# Altium PCB mixer.PcbDoc
Units mm, origin at the board's own origin, x right, y up, seen from the top; angles counter-clockwise.
Board outline 50 x 50 mm, 4 copper layers (Top Layer, Layer 2, Layer 3, Bottom Layer), stack 1.513 mm thick; 68 components, 37 nets, 156 pads, 152 vias.
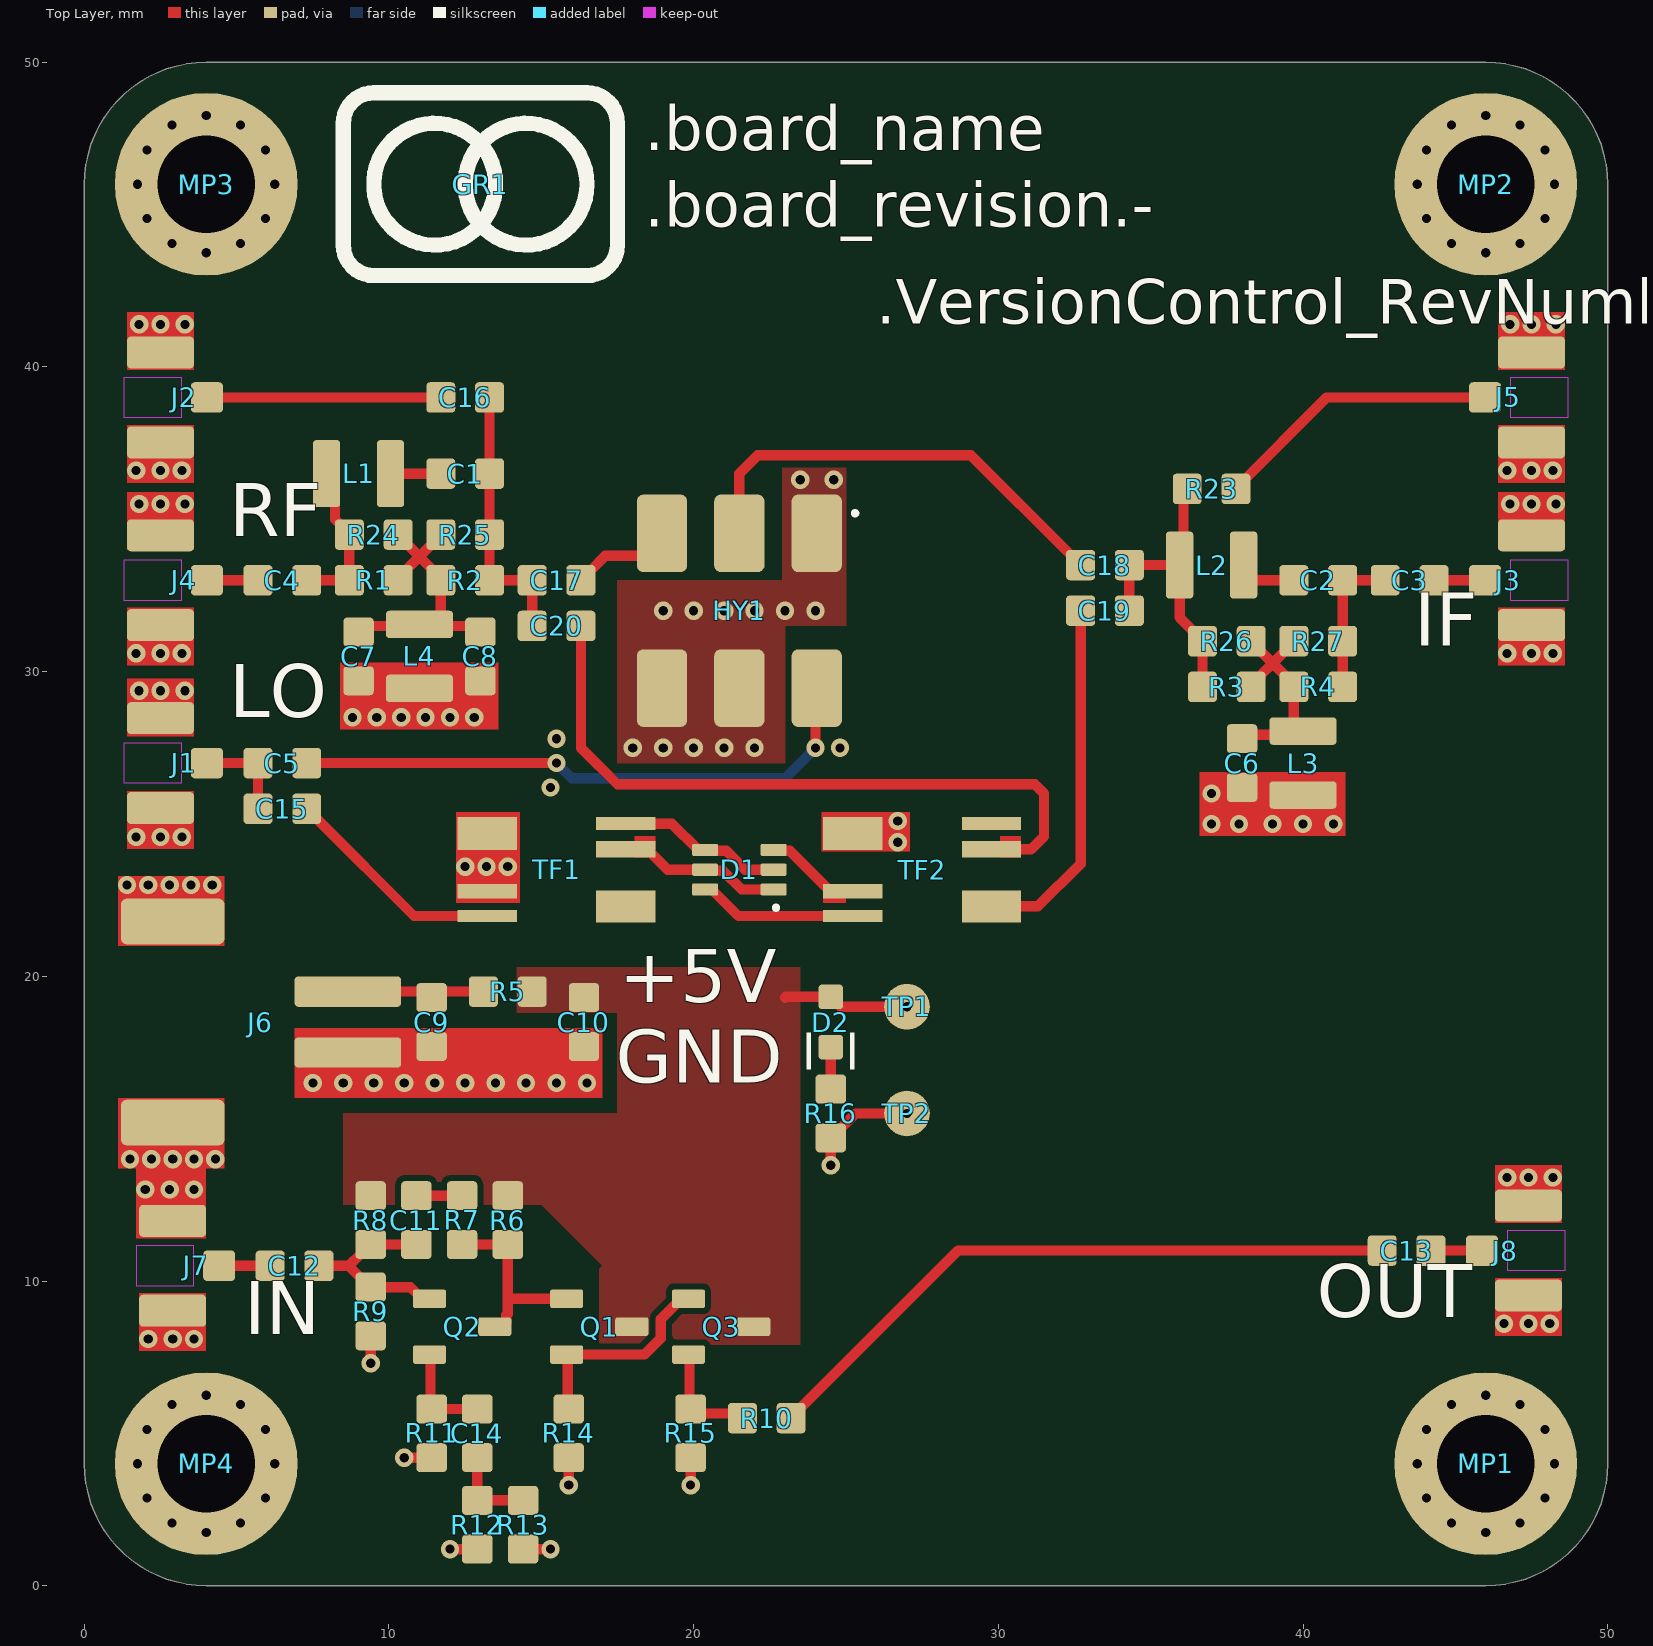
[diagram p0: Top Layer view]
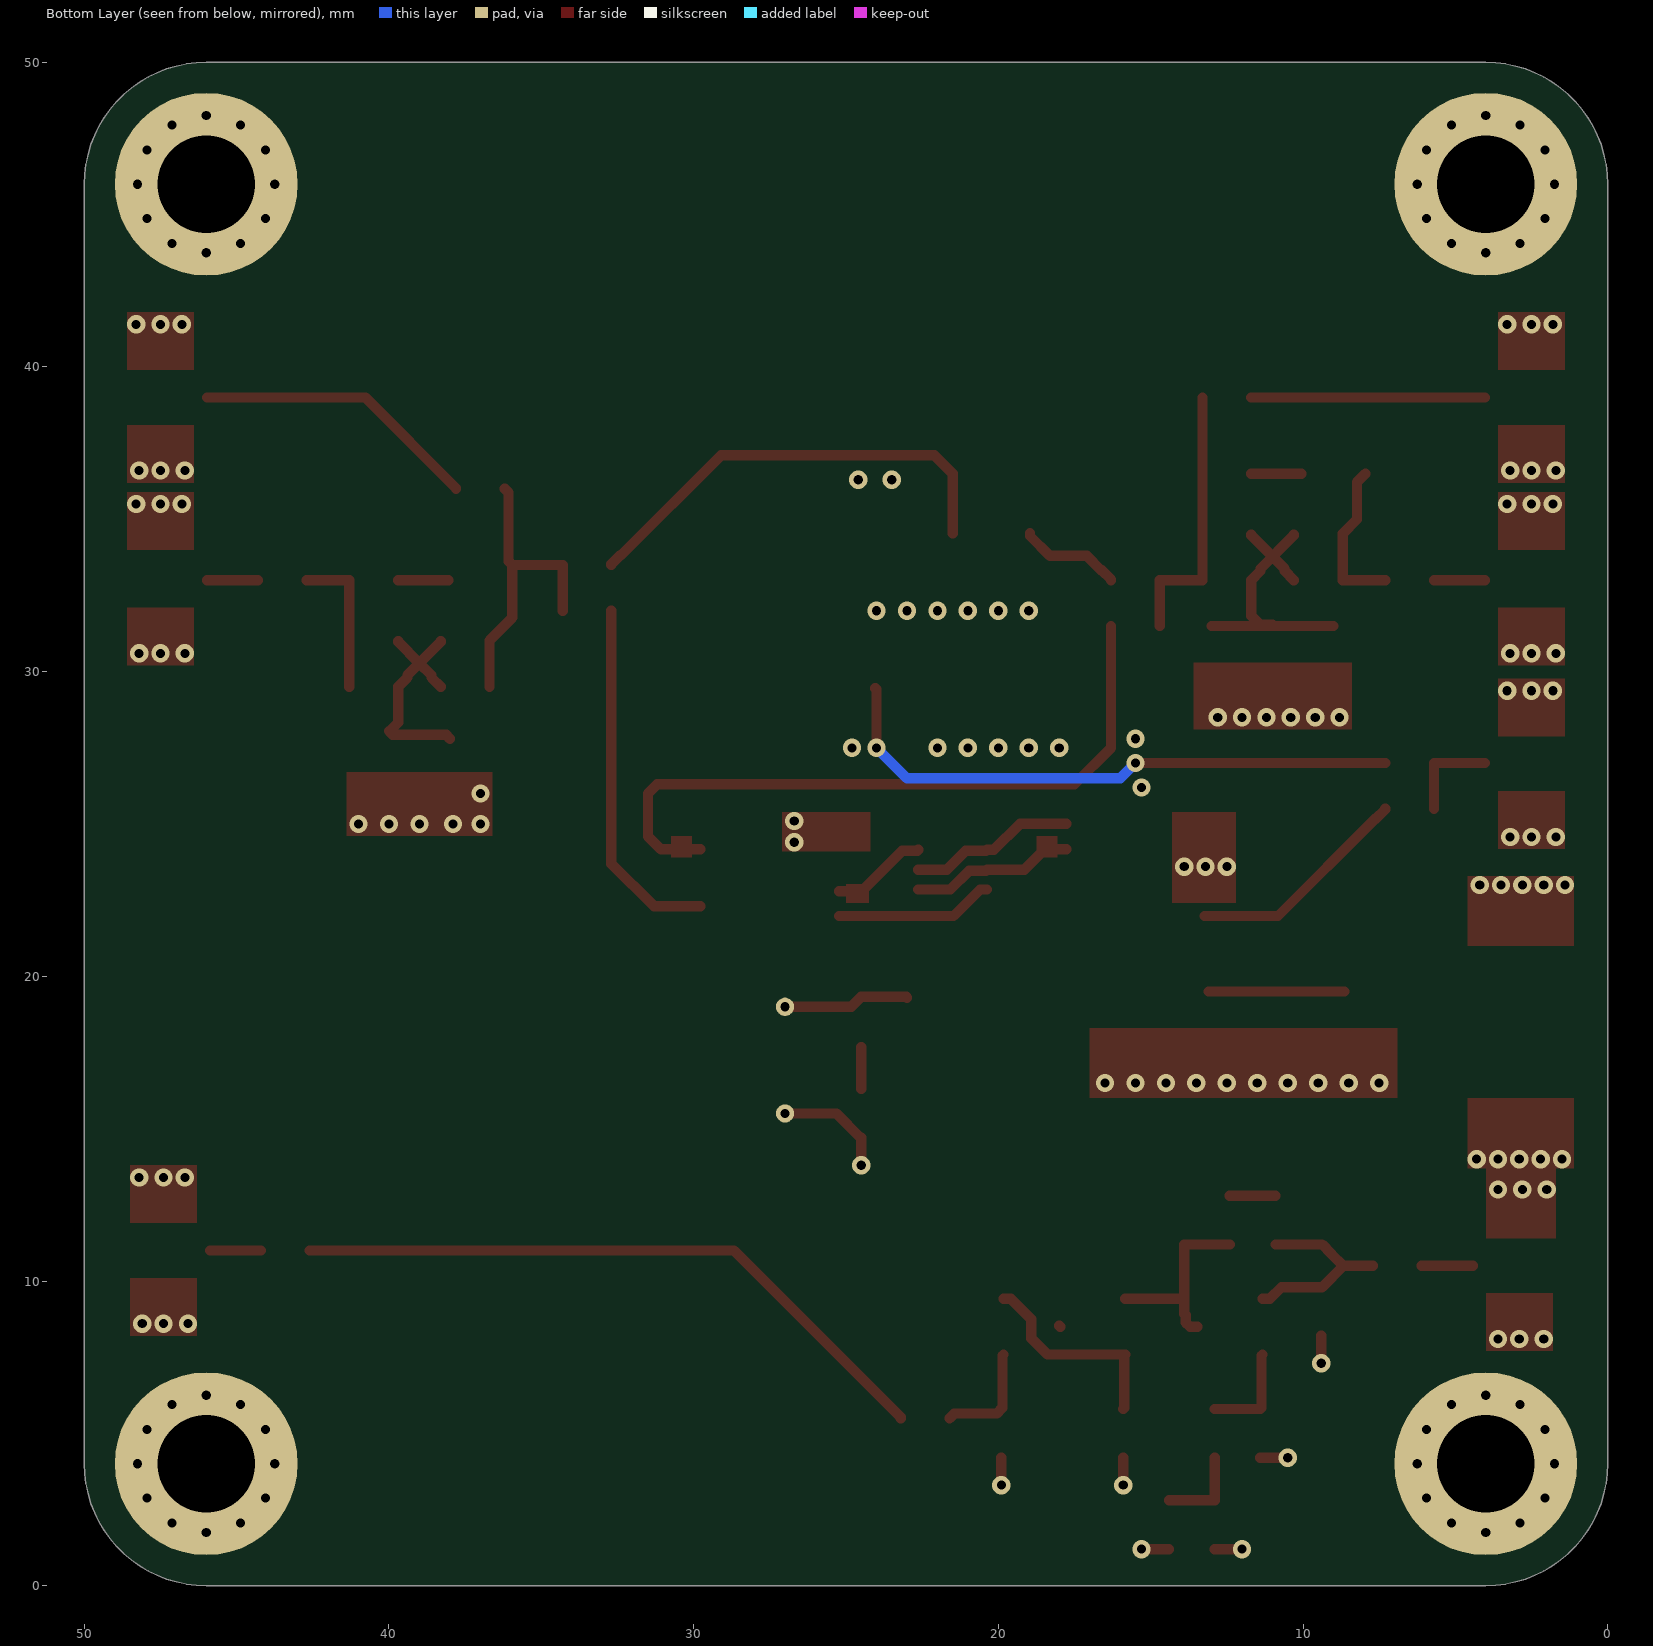
[diagram p1: Bottom Layer view, seen from below]
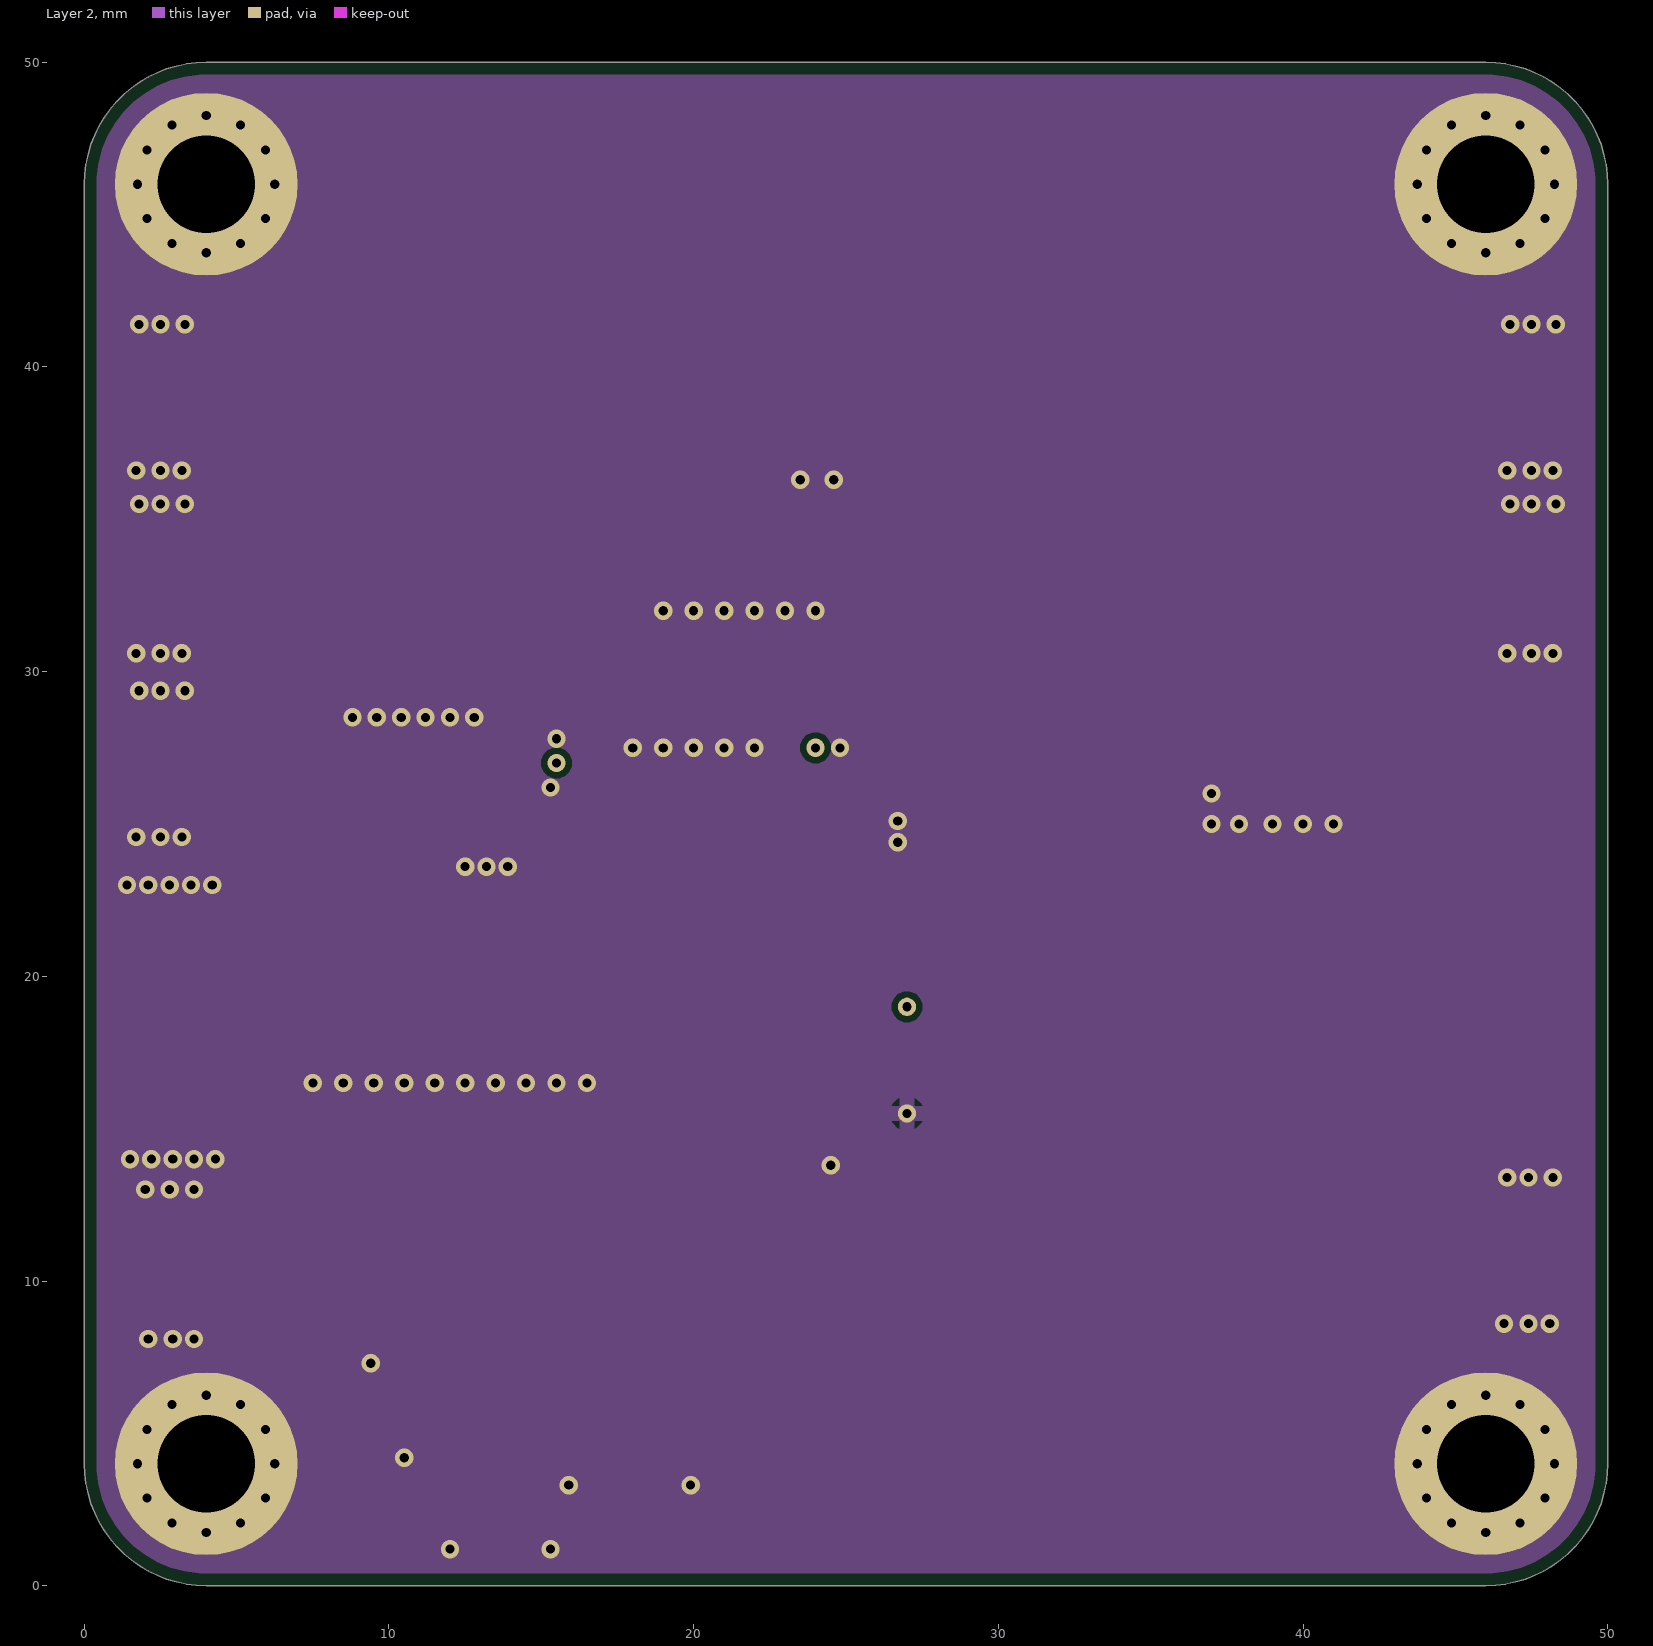
[diagram p2: Layer 2]
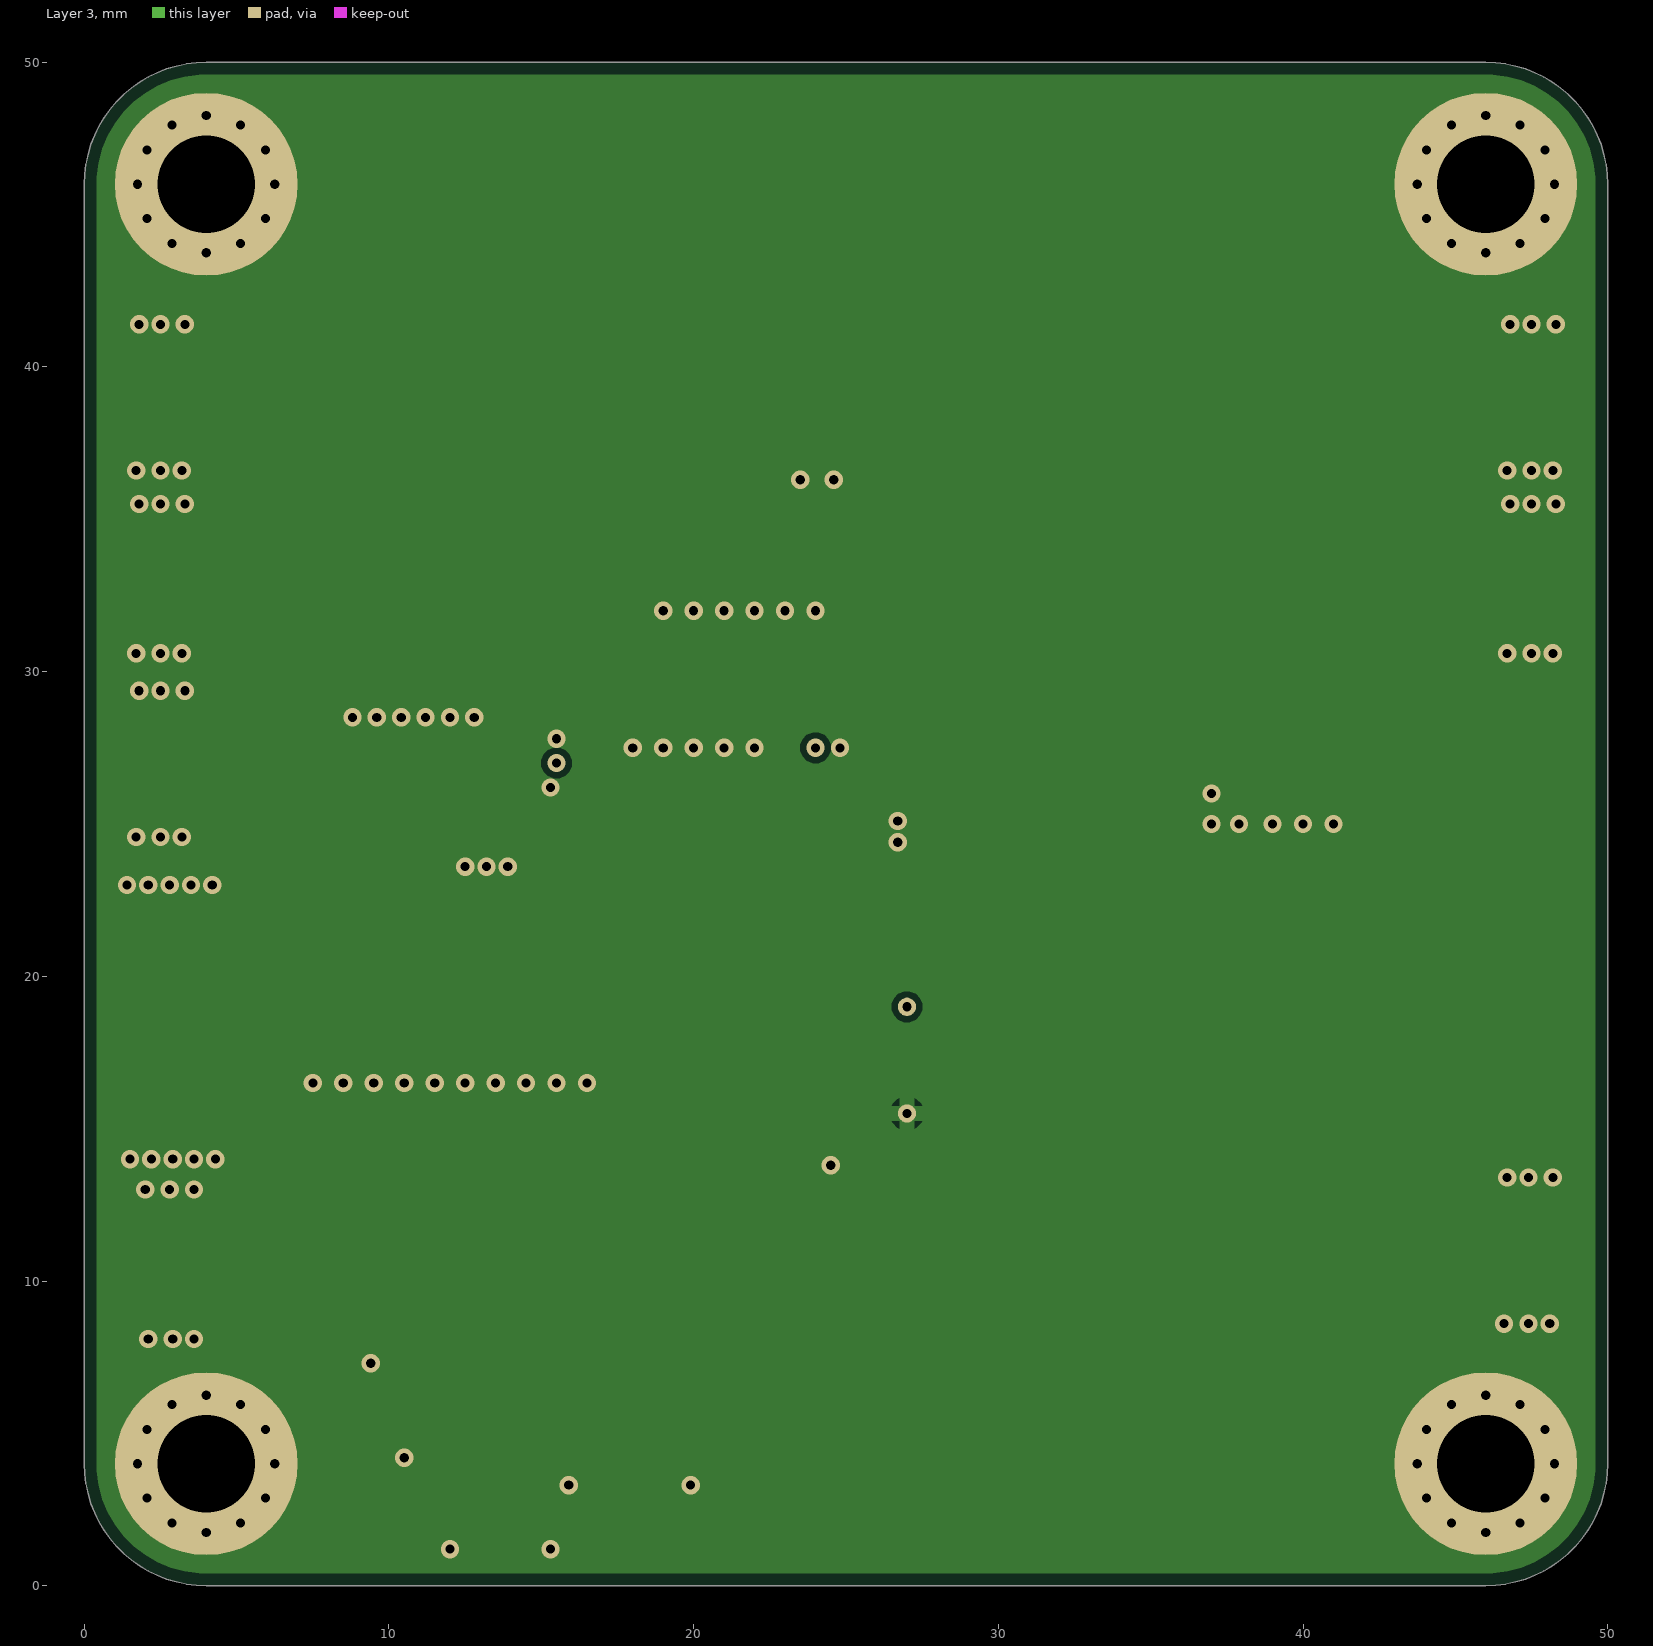
[diagram p3: Layer 3]
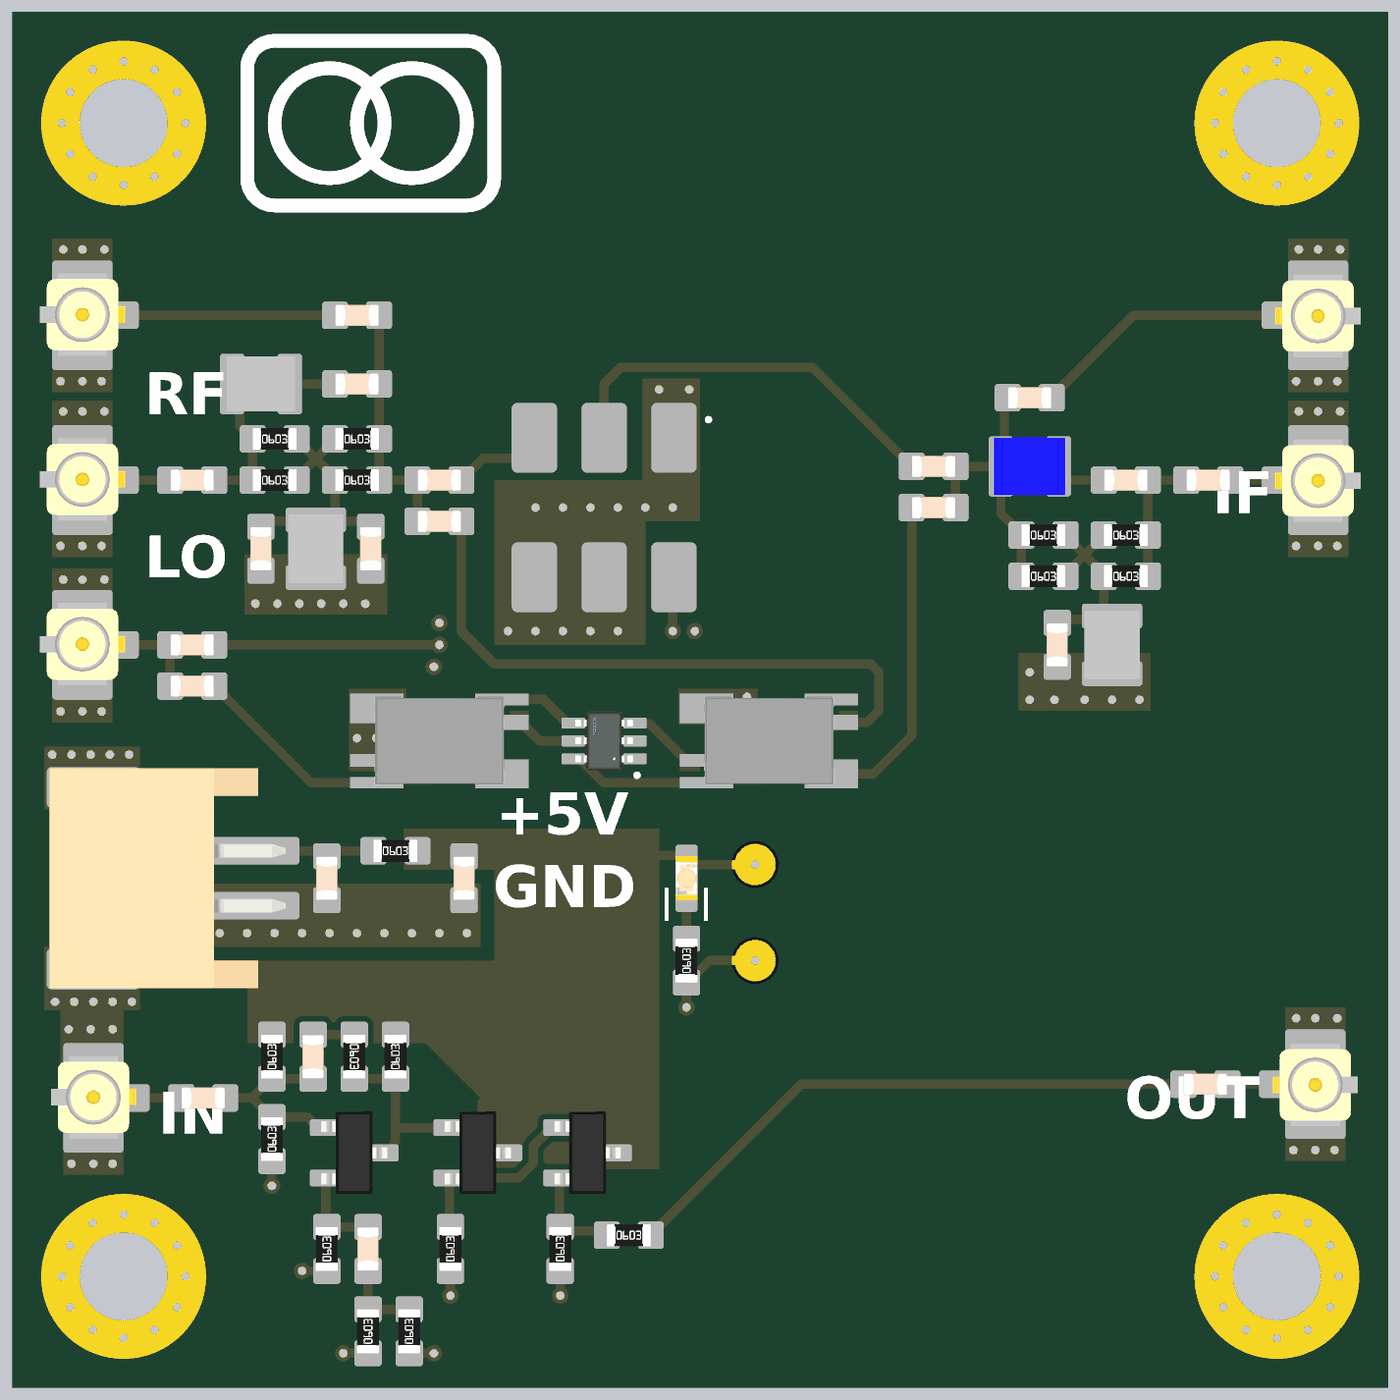
[diagram p4: 3D render of the assembled board from above, using the file's embedded part models]

## Layer stack, top to bottom
Top Solder: solder mask 0.0254, SM-001, Dk 4
Top Layer: signal copper 0.035
Dielectric 2: prepreg 0.2083, PP-022, Dk 4.5
Layer 2: signal copper 0.018
Dielectric 3: core 0.9906, Core-042, Dk 4.6
Layer 3: signal copper 0.018
Dielectric 5: prepreg 0.2083, PP-022, Dk 4.5
Bottom Layer: signal copper 0.035
Bottom Solder: solder mask 0.0254, SM-001, Dk 4

## Board outline
0,4 ccw(c4,4) 4,0 46,0 ccw(c46,4) 50,4 50,46 ccw(c46,46) 46,50 4,50 ccw(c4,46) 0,46

## Design rules (kind name [scope] priority, off if disabled: settings)
BoardOutlineClearance [IsElectrical or IsPoly] p1: gap=0.4 ignorepadtopadclearanceinfootprint=FALSE
Clearance Clearance_SelectiveSoldering [ispad and IsThruPin and not InComponentClass('NoSelectiveSoldering') vs ispad and IsSMTPin] p1 off: gap=4 ignorepadtopadclearanceinfootprint=TRUE // excludes smt studs
Clearance Clearance_NTPH_to_Track [IsTrack vs IsPad and IsThruPin and not PadIsPlated] p2: gap=0.254 ignorepadtopadclearanceinfootprint=TRUE
Clearance Clearance_TH_Pad_to_TH_Pad [IsPad and IsThruPin vs IsPad and IsThruPin] p3: gap=0.5 ignorepadtopadclearanceinfootprint=TRUE
Clearance Clearance_SMT_Pad_to_SMT_Pad [IsPad and IsSMTPin vs IsPad and IsSMTPin] p4: gap=0 ignorepadtopadclearanceinfootprint=TRUE
Clearance Clearance_No_Via_in_Pad [IsPad and not InPadClass('Via_in_pad_allowed') vs (IsVia AND not HasFootprint('PTH-M3D6.5_VIA-RING'))] p5 off: gap=0.1 ignorepadtopadclearanceinfootprint=TRUE
Clearance Clearance_Others [All] p6: gap=0.2 ignorepadtopadclearanceinfootprint=FALSE except(0.127: SMDPad-SMDPad)
ComponentClearance OverlappingComponents [InComponentClass('Overlap') vs InComponentClass('Overlap')] p1: gap=-10 collisioncheckmode=3 verticalgap=0 showdistances=TRUE donotcheckwithout3dbody=TRUE
ComponentClearance [All] p2: gap=0 collisioncheckmode=3 verticalgap=0.254 showdistances=FALSE
DiffPairsRouting HDMI [InDifferentialPairClass('HDMI')] p1: maxlimit=0.254 minlimit=0.2 mostfreqgap=0.254 toplayer_maxgap=0.2 toplayer_prefgap=0.2 toplayer_minwidth=0.207 toplayer_maxwidth=0.207 toplayer_prefwidth=0.207 midlayer1_minwidth=0.381 midlayer1_maxwidth=0.381 midlayer1_prefwidth=0.381 midlayer2_minwidth=0.381 midlayer2_maxwidth=0.381 midlayer2_prefwidth=0.381 bottomlayer_maxgap=0.2 bottomlayer_prefgap=0.2 bottomlayer_minwidth=0.207 bottomlayer_maxwidth=0.207 bottomlayer_prefwidth=0.207 impedanceprofiledriven=TRUE maxuncoupledlength=12.7
DiffPairsRouting ETH [InDifferentialPairClass('ETH')] p2: maxlimit=0.254 minlimit=0.2 mostfreqgap=0.254 toplayer_maxgap=0.2 toplayer_prefgap=0.2 toplayer_minwidth=0.207 toplayer_maxwidth=0.207 toplayer_prefwidth=0.207 midlayer1_minwidth=0.381 midlayer1_maxwidth=0.381 midlayer1_prefwidth=0.381 midlayer2_minwidth=0.381 midlayer2_maxwidth=0.381 midlayer2_prefwidth=0.381 bottomlayer_maxgap=0.2 bottomlayer_prefgap=0.2 bottomlayer_minwidth=0.207 bottomlayer_maxwidth=0.207 bottomlayer_prefwidth=0.207 maxuncoupledlength=12.7
DiffPairsRouting USB [InDifferentialPairClass('USB')] p3: maxlimit=0.235 minlimit=0.192 mostfreqgap=0.235 toplayer_mingap=0.235 toplayer_minwidth=0.17 toplayer_maxwidth=0.17 toplayer_prefwidth=0.17 midlayer1_maxgap=0.192 midlayer1_prefgap=0.192 midlayer1_minwidth=0.13 midlayer1_maxwidth=0.13 midlayer1_prefwidth=0.13 midlayer2_mingap=0.192 midlayer2_maxgap=0.192 midlayer2_prefgap=0.192 midlayer2_minwidth=0.13 midlayer2_maxwidth=0.13 midlayer2_prefwidth=0.13 bottomlayer_mingap=0.235 bottomlayer_minwidth=0.17 bottomlayer_maxwidth=0.17 bottomlayer_prefwidth=0.17 impedanceprofiledriven=TRUE impedanceprofileid={9A9647CF-1067-4F27-82A4-C3440F9DA648} maxuncoupledlength=12.7
HoleSize NPTH_HoleSize [IsPad And not PadIsPlated] p1: absolutevalues=TRUE maxlimit=3.7 minlimit=0.2 maxpercent=80.000 minpercent=20.000
HoleSize Pad_HoleSize [IsPad] p2: absolutevalues=TRUE maxlimit=4.2 minlimit=0.3 maxpercent=80.000 minpercent=20.000
HoleSize Via_HoleSize [IsVia] p3: absolutevalues=TRUE maxlimit=6.3 minlimit=0.2 maxpercent=80.000 minpercent=20.000
HoleToHoleClearance [All] p1: gap=0.254 allowstackedmicrovias=FALSE
MatchedLengths InterPair_skew_HDMI [InDifferentialPairClass('HDMI')] p1: tolerance=1 checknetsindiffpair=FALSE checkdiffpairvsdiffpair=TRUE checkxsignals=TRUE checkothers=TRUE
MatchedLengths IntraPair_skew_all_DiffPairs [InDifferentialPairClass('All Differential Pairs')] p2: tolerance=0.15 checknetsindiffpair=TRUE checkdiffpairvsdiffpair=FALSE checkxsignals=FALSE checkothers=FALSE
MinimumAnnularRing [All] p1: minimumring=0.13
MinimumSolderMaskSliver [All] p1: minsoldermaskwidth=0.2
PolygonConnect PolygonConnect_NonSoldering [All vs InComponentClass('NonSolder')] p1: connectstyle=Direct reliefconductorwidth=0.254 reliefentries=4 polygonreliefangle="90 Angle" airgapwidth=0.254
PolygonConnect [All] p2: thpad.connectstyle=Relief thpad.reliefconductorwidth=0.5 thpad.reliefentries=4 thpad.polygonreliefangle="90 Angle" thpad.airgapwidth=0.254 smdpad.connectstyle=Direct smdpad.reliefconductorwidth=0.5 smdpad.reliefentries=4 smdpad.polygonreliefangle="90 Angle" smdpad.airgapwidth=0.254 via.connectstyle=Direct via.reliefconductorwidth=0.5 via.reliefentries=4 via.polygonreliefangle="90 Angle" via.airgapwidth=0.254
RoutingVias [All] p1: holewidth=0.3 width=0.6 viastyle="Through Hole" minholewidth=0.3 minwidth=0.6 maxholewidth=0.3 maxwidth=0.6
SilkToSolderMaskClearance [IsPad] p1: minsilkscreentomaskgap=0.2 clearancetoexposedcopper=TRUE
SolderMaskExpansion SolderMaskExpansion_Via [IsVia] p1: expansion=0.102 istentingtop=TRUE
SolderMaskExpansion SolderMaskExpansion_notVia [not IsVia] p2: expansion=0.05 istentingtop=FALSE
SupplyNets "Schematic Supply Nets_5" [InNet('VCC')] p1: voltage=0.000
SupplyNets "Schematic Supply Nets_2" [InNet('GND')] p2: voltage=0.000
Width S50_Width [InNetClass('S50')] p1: maxlimit=0.338 minlimit=0.133 preferedwidth=0.338 toplayer_minwidth=0.338 bottomlayer_minwidth=0.338 impedanceprofiledriven=TRUE impedanceprofileid={51D6754A-4034-4FAC-8A16-9F3950D7C6EB} impedanceprofilevalue=50.000000 minimp=50.000000 maximp=50.000000 favimp=50.000000
Width Default_Width [All] p2: maxlimit=2.5 minlimit=0.15 preferedwidth=0.33
24 further rules are at their usual default settings.

## Classes and differential pairs
component class NonSolder: MP1 MP2 MP3 MP4
net class S50: IF LO NetC1_1 NetC2_1 NetC2_2 NetC3_1 NetC4_1 NetC4_2 NetC5_2 NetC6_2 NetC7_2 NetC11_2 NetC12_2 NetC13_1 NetC13_2 NetC14_1 NetC15_2 NetC16_2 NetC17_2 NetC18_1 NetC19_1 NetC20_2 NetD1_1 NetD1_2 NetD1_3 NetD1_6 NetJ5_1 NetQ1_1 NetQ1_2 NetQ3_2 RF

## Components (designator, comment, footprint, x,y, rotation, side; value= is the part's Value field where it differs from the comment)
C1 "Capacitor 6.8pF +/-0.5pF 50V NP0 0603" 0603-C-N 12.5,36.5 r0 top value=6.8pF
C2 "Capacitor 33pF +/-1% 50V NP0 0603" 0603-C-N 40.5,33 r0 top value=33pF
C3 "Capacitor 100nF +/-10% 50V X7R 0603" 0603-C-N 43.5,33 r180 top value=100nF
C4 "Capacitor 10nF 50V NP0 0603" 0603-C-N 6.5,33 r0 top value=10nF
C5 "Capacitor 10nF 50V NP0 0603" 0603-C-N 6.5,27 r0 top value=10nF
C6 "Capacitor 3.3nF +/-10% 50V X7R 0603" 0603-C-N 38,27 r90 top value=3.3nF
C7 "Capacitor 100pF +/-5% 50V NP0 0603" 0603-C-N 9,30.5 r90 top value=100pF
C8 "Capacitor 47pF +/-5% 50V C0G 0603" 0603-C-N 13,30.5 r90 top value=47pF
C9 "Capacitor 100nF +/-10% 50V X7R 0603" 0603-C-N 11.4,18.5 r90 top value=100nF
C10 "Capacitor 100nF +/-10% 50V X7R 0603" 0603-C-N 16.4,18.5 r90 top value=100nF
C11 "Capacitor 100nF +/-10% 50V X7R 0603" 0603-C-N 10.9,12 r270 top value=100nF
C12 "Capacitor 100nF +/-10% 50V X7R 0603" 0603-C-N 6.9,10.5 r180 top value=100nF
C13 "Capacitor 100nF +/-10% 50V X7R 0603" 0603-C-N 43.4,11 r0 top value=100nF
C14 "Capacitor 100nF +/-10% 50V X7R 0603" 0603-C-N 12.9,5 r270 top value=100nF
C15 "Capacitor 10nF 50V NP0 0603" 0603-C-N 6.5,25.5 r0 top value=10nF
C16 "Capacitor 10nF 50V NP0 0603" 0603-C-N 12.5,39 r180 top value=10nF
C17 "Capacitor 10nF 50V NP0 0603" 0603-C-N 15.5,33 r0 top value=10nF
C18 "Capacitor 10nF 50V NP0 0603" 0603-C-N 33.5,33.5 r0 top value=10nF
C19 "Capacitor 10nF 50V NP0 0603" 0603-C-N 33.5,32 r0 top value=10nF
C20 "Capacitor 10nF 50V NP0 0603" 0603-C-N 15.5,31.5 r0 top value=10nF
D1 "BAV99S115" SOT-363-N 21.5,23.5 r180 top
D2 "150060GS84000" WL-SMCW_0603_150060xx8x000 24.5,18.5 r90 top
GR1 "Logo" LOGO_9x6mm 13,46 r0 top
HY1 "ADE-1+" ADE-1+ 21.5,32 r270 top
J1 "U.FL-R-SMT(10)" HRS-U.FL-R-SMT_V 2.5,27 r90 top value=U.FL
J2 "U.FL-R-SMT(10)" HRS-U.FL-R-SMT_V 2.5,39 r90 top value=U.FL
J3 "U.FL-R-SMT(10)" HRS-U.FL-R-SMT_V 47.5,33 r270 top value=U.FL
J4 "U.FL-R-SMT(10)" HRS-U.FL-R-SMT_V 2.5,33 r90 top value=U.FL
J5 "U.FL-R-SMT(10)" HRS-U.FL-R-SMT_V 47.5,39 r270 top value=U.FL
J6 "620102131822" 620102131822 6.9,18.5 r270 top value=JST-PH
J7 "U.FL-R-SMT(10)" HRS-U.FL-R-SMT_V 2.9,10.5 r90 top value=U.FL
J8 "U.FL-R-SMT(10)" HRS-U.FL-R-SMT_V 47.4,11 r270 top value=U.FL
L1 "744762239GA" WE-KI_1008 9,36.5 r0 top
L2 "744758368A" WE-RFH_1008A 37,33.5 r0 top
L3 "744762168GA" WE-KI_1008 40,27 r90 top
L4 "744762118A" WE-KI_1008 11,30.5 r90 top
MP1 "MountingHole" PTH-M3D6.5_VIA-RING 46,4 r0 top
MP2 "MountingHole" PTH-M3D6.5_VIA-RING 46,46 r0 top
MP3 "MountingHole" PTH-M3D6.5_VIA-RING 4,46 r0 top
MP4 "MountingHole" PTH-M3D6.5_VIA-RING 4,4 r0 top
Q1 "MMBT3904" SOT-23-3-N 16.9,8.5 r0 top
Q2 "MMBT3904" SOT-23-3-N 12.4,8.5 r0 top
Q3 "MMBT3904" SOT-23-3-N 20.9,8.5 r0 top
R1 "Resistor 100R +/-1% 50V 0603" 0603-R-N 9.5,33 r0 top value=100
R2 "Resistor 100R +/-1% 50V 0603" 0603-R-N 12.5,33 r0 top value=100
R3 "Resistor 100R +/-1% 50V 0603" 0603-R-N 37.5,29.5 r0 top value=100
R4 "Resistor 100R +/-1% 50V 0603" 0603-R-N 40.5,29.5 r0 top value=100
R5 "Resistor 10R +/-1% 50V 0603" 0603-R-N 13.9,19.5 r0 top value=10
R6 "Resistor 330R +/-1% 50V 0603" 0603-R-N 13.9,12 r90 top value=330
R7 "Resistor 680R +/-1% 0.1W 0603" 0603-R-N 12.4,12 r270 top value=680
R8 "Resistor 3.6k +/-0.1W 1% 0603" 0603-R-N 9.4,12 r90 top value=3.6k
R9 "Resistor 1.5k +/-1% 50V 0603" 0603-R-N 9.4,9 r90 top value=1.5k
R10 "Resistor 47R +/-1% 0.1W 0603" 0603-R-N 22.4,5.5 r0 top value=47
R11 "Resistor 91R +/-1% 0.1W 0603" 0603-R-N 11.4,5 r90 top value=91
R12 "Resistor 18R +/-1% 0.1W 0603" 0603-R-N 12.9,2 r90 top value=18
R13 "Resistor 330R +/-1% 50V 0603" 0603-R-N 14.4,2 r90 top value=330
R14 "Resistor 470R +/-1% 50V 0603" 0603-R-N 15.9,5 r90 top value=470
R15 "Resistor 62R +/-1% 0.1W 0603" 0603-R-N 19.9,5 r90 top value=62
R16 "Resistor 3.6k +/-0.1W 1% 0603" 0603-R-N 24.5,15.5 r90 top value=3.6k
R23 "Capacitor 10nF 50V NP0 0603" 0603-C-N 37,36 r180 top value=10nF
R24 "Resistor 100R +/-1% 50V 0603" 0603-R-N 9.5,34.5 r0 top value=100
R25 "Resistor 100R +/-1% 50V 0603" 0603-R-N 12.5,34.5 r0 top value=100
R26 "Resistor 100R +/-1% 50V 0603" 0603-R-N 37.5,31 r0 top value=100
R27 "Resistor 100R +/-1% 50V 0603" 0603-R-N 40.5,31 r0 top value=100
TF1 "ALT4532P-181-T05G" TF_STD_LAN1000_4532_6P 15.5,23.5 r0 top value=180uH
TF2 "ALT4532P-181-T05G" TF_STD_LAN1000_4532_6P 27.5,23.5 r0 top value=180uH
TP1 "Testpad with multiple sizes" TP_1.5mm_0.3mmHole 27,19 r0 top
TP2 "Testpad with multiple sizes" TP_1.5mm_0.3mmHole 27,15.5 r0 top

## Footprints (in the part's own frame and the unit in brackets; to place one, negate y for a bottom-side part, rotate by r counter-clockwise, add the part's x,y. Pads: shape width x height; smd on the part's side, far side on the other; paste and mask are expansions set on the pad)
0603-C-N [mm]
  rrect25% 0.95x1 smd: 1(-0.8,0) 2(0.8,0)
  body extent -0.8,-0.4 0.8,0.4, height 0.81
0603-R-N [mm]
  rrect25% 0.95x1 smd: 1(-0.8,0) 2(0.8,0)
  body extent -0.8,-0.4 0.8,0.4, height 0.47
620102131822 [mm] "2.00mm SMT Male Horizontal Shrouded Header, 2p"
  rrect25% 1x3.5 smd: 1(-1,1.75) 2(1,1.75)
  rrect25% 1.5x3.4 smd: MP1(-3.3,-4) MP2(3.3,-4)
  body extent -4,-5.6 4,3, height 5.57
ADE-1+ [mm]
  rrect25% 2.54x1.65 smd: 1(-2.54,2.54) 2(-2.54,0) 3(-2.54,-2.54) 4(2.54,-2.54) 5(2.54,0) 6(2.54,2.54)
  silkscreen extent -3.21,3.79 -3.19,3.81, body extent -2.8,-4 2.8,4, height 4.11
HRS-U.FL-R-SMT_V [mm] "SMD, 3-Leads, Body 2.6x2.6mm"
  rrect25% 1.05x2.2 smd: 1(-1.475,0) 2(1.475,0)
  rrect25% 1x1.05 smd: 3(0,-1.525)
  Top Layer keep-out region: -0.65,-0.7 0.65,-0.7 0.65,1.2 -0.65,1.2
  body extent -1.48,-1.55 1.52,1.55, height 1.25
LOGO_9x6mm [mm]
  silkscreen extent -4.5,-3 4.5,3
PTH-M3D6.5_VIA-RING [mm]
  round 6 hole 3.2: 1(0,0)
SOT-23-3-N [mm] "SOT-23, 3-Leads, Body 3x1.4mm, Pitch 0.95mm, IPC Medium Density"
  rrect25% 1.09x0.61 smd: 1(-1.07,0.915) 2(-1.07,-0.915) 3(1.07,0)
  body extent -1.22,-1.5 1.22,1.5, height 1
SOT-363-N [mm] "SOT363, TSSOP-6, SC70-6, SC-88  / IPC Medium density (Nominal size), pitch 0.65mm"
  rrect25% 0.85x0.4 smd: 1(-1.125,0.65) 2(-1.125,0) 3(-1.125,-0.65) 4(1.125,-0.65) 5(1.125,0) 6(1.125,0.65)
  silkscreen extent -1.21,1.24 -1.19,1.26, body extent -1.71,-1.33 1.71,1.33, height 0.25
TF_STD_LAN1000_4532_6P [mm]
  rect 1.95x0.4 smd: 1(-2.275,-1.52)
  rect 1.95x0.475 smd: 2(-2.275,-0.71)
  rect 1.95x1.075 smd: 3(-2.275,1.187)
  rect 1.95x0.42 smd: 4(2.275,1.513)
  rect 1.95x0.545 smd: 5(2.275,0.675)
  rect 1.95x1.05 smd: 6(2.275,-1.2)
  Top Layer region: -3.25,-1.1 -2.5,-1.1 -2.5,-0.475 -3.25,-0.475
  Top Layer region: 2.55,0.4 3.25,0.4 3.25,1.1 2.55,1.1
  body extent -2.37,-1.62 2.37,1.62, height 2.31
TP_1.5mm_0.3mmHole [mm] "Centering hole to keep your DMM-probe in place so that it doesn't skid off to other signals."
  round 1.5 / inner round 0.6 / far side round 0.6 hole 0.3 mask+0.102: 1(0,0)
WE-KI_1008 [mm] "SMD Wire Wound Ceramic Inductor, body 2.50x2.00mm"
  rrect25% 0.9x2.2 smd: 1(-1.05,0) 2(1.05,0)
  body extent -1.25,-1 1.25,1, height 1.12
WE-RFH_1008A [mm] "Ferrite SMD Inductor, body 2.60x2.10mm, 2-Leads"
  rrect25% 0.9x2.2 smd: 1(-1.05,0) 2(1.05,0)
  body extent -1.3,-1.05 1.3,1.05, height 1.8
WL-SMCW_0603_150060xx8x000 [mm] "SMD Mono-color Chip LED, body 1.6x0.8mm"
  rrect25% 0.8x0.8 smd: 1(-0.825,0) 2(0.825,0)
  silkscreen extent -1.55,-0.78 -0.35,0.79, body extent -0.8,-0.4 0.8,0.4, height 0.95

## Part data
C1: library part CMP-072-000121-14, "WCAP-CSGP Multilayer Ceramic Chip Capacitor, General Purpose, size 0603, NP0, 6.8pF, 50VDC", Capacitor Type=MLCC, Case/Package=0603, Dielectric=NP0, Insulation Resistance=10GO, Max Operating Temperature=125°C, Min Operating Temperature=-55°C, Tolerance=0.5pF, Voltage Rating=50V, ComponentLink1Description="Website Link", ComponentLink1URL=https://www.we-online.com/redexpert/article/885012006050?ad, ComponentLink2Description="Datasheet Link", ComponentLink2URL=https://www.we-online.com/redexpert/spec/885012006050?ad, Design Item ID=885012006050, Height=0.8mm, Length=1.6mm, Match Code=WCAP-CSGP, Mounting Technology=SMT, Packaging="Tape and Reel", Pins=2, Q Factor=536, Source=WCAP-CSGP.SchLib, Technical Reference=NP006036R8D050DFCT10000, Usage="General Purpose", Width=0.8mm
C2: library part CMP-001-00146-2, "Multilayer Ceramic Capacitor 33 Pf 50 V ½ 1% C0G (NP0) 0603 [1608 Metric]", Case Code (Imperial)=0603, Case Code (Metric)=1608, Dielectric=C0G, Insulation Resistance=10GR, JLCPCB Part #=C519485, Max Operating Temperature=125°C, Min Operating Temperature=-55°C, Tolerance=1%, Voltage Rating=50V, Case/Package=0603, Depth=0.8mm, Dissipation Factor=0.1%, Halogen Free="Halogen Free", Height=0.8mm, Lead Free="Lead Free", Length=1.6mm, Mounting Technology="Surface Mount", Packaging="Tape and Reel", Page Part #=CCQF330, Radiation Hardening=No, RoHS Compliant=Yes, Series=CC, Termination=SMD/SMT, Thickness=0.035inch, Voltage Rating (DC)=50V, Width=0.8mm
C3 C9 C10 C11 C12 C13 C14: library part CMP-001-00017-24, "Capacitor MLCC, General Purpose, size 0603, X7R, 100nF, +/-10%, 50V", Capacitor Type=MLCC, Case/Package=0603, Dielectric=X7R, JLCPCB Part #=C14663, Max Operating Temperature=125°C, Min Operating Temperature=-55°C, Tolerance=10%, Voltage Rating=50V, Height=0.8mm, Length=1.6mm, Mounting Technology=SMT, Page Part #=CCQK104, Pins=2, RoHS Compliant=True, Usage="General Purpose", Width=0.8mm
C4 C5 C15 C16 C17 C18 C19 C20 R23: library part CMP-001-00137-6, "Multilayer Ceramic Capacitor, Grm Series, 0.01 F, 5%, C0g / Np0, 50 V, 0603 [1608 Metric]", Case Code (Imperial)=0603, Case Code (Metric)=1608, Dielectric=C0G, JLCPCB Part #=C85973, Max Operating Temperature=125°C, Min Operating Temperature=-55°C, Package Quantity=4000, Temperature Coefficient=30ppm/°C, Tolerance=5%, Voltage=50V, Case/Package=0603, Depth=0.8mm, FLIR Part #=YCAM10N-7, Height=0.8mm, Lead Free="Lead Free", Lead Pitch=0.5mm, Length=1.6mm, Material=Ceramic, Mounting Technology="Surface Mount", Packaging="Cut Tape", Reach SVHC Compliant=No, RoHS Compliant=Yes, Series=GRM, Termination=SMD/SMT, Thickness=0.035inch, Voltage Rating=50V, Voltage Rating (DC)=50V, Width=0.8mm
C6: library part CMP-072-000609-13, "WCAP-CSGP Multilayer Ceramic Chip Capacitor, General Purpose, size 0603, X7R, 3.3nF, 50VDC", Capacitor Type=MLCC, Case/Package=0603, Dielectric=X7R, Insulation Resistance=10GO, Max Operating Temperature=125°C, Min Operating Temperature=-55°C, Tolerance=10%, Voltage Rating=50V, ComponentLink1Description="Website Link", ComponentLink1URL=https://www.we-online.com/redexpert/article/885012206086?ad, ComponentLink2Description="Datasheet Link", ComponentLink2URL=https://www.we-online.com/redexpert/spec/885012206086?ad, Design Item ID=885012206086, Dissipation Factor=2.5%, Height=0.8mm, Length=1.6mm, Match Code=WCAP-CSGP, Mounting Technology=SMT, Packaging="Tape and Reel", Pins=2, Source=WCAP-CSGP.SchLib, Technical Reference=X7R0603332K050DFCT10000, Usage="General Purpose", Width=0.8mm
C7: library part CMP-072-000128-17, "WCAP-CSGP Multilayer Ceramic Chip Capacitor, General Purpose, size 0603, NP0, 100pF, 50VDC", Capacitor Type=MLCC, Case/Package=0603, Dielectric=NP0, Insulation Resistance=10GO, JLCPCB Part #=C14858, Max Operating Temperature=125°C, Min Operating Temperature=-55°C, Tolerance=5%, Voltage Rating=50V, ComponentLink1Description="Website Link", ComponentLink1URL=https://www.we-online.com/redexpert/article/885012006057?ad, ComponentLink2Description="Datasheet Link", ComponentLink2URL=https://www.we-online.com/redexpert/spec/885012006057?ad, Design Item ID=885012006057, Height=0.8mm, Length=1.6mm, Match Code=WCAP-CSGP, Mounting Technology=SMT, Packaging="Tape and Reel", Page Part #=CCQJ101, Pins=2, Q Factor=1000, Source=WCAP-CSGP.SchLib, Technical Reference=NP00603101J050DFCT10000, Usage="General Purpose", Width=0.8mm
C8: library part CMP-001-00100-15, "Capacitor MLCC, General Purpose, size 0603, C0G, 47pF, +/-5%, 50V", Capacitor Type=MLCC, Case/Package=0603, Dielectric=C0G, JLCPCB Part #=C1671, Max Operating Temperature=125°C, Min Operating Temperature=-55°C, Temperature Coefficient=30ppm/°C, Tolerance=5%, Voltage Rating=50V, Height=0.8mm, Length=1.6mm, Mounting Technology=SMT, Packaging="Tape and Reel", Pins=2, REACH SVHC=Unknown, RoHS Compliant=True, Usage="General Purpose", Width=0.8mm
D1: library part CMP-004-00059-1, "Diode-gp Power Switching", Average Rectified Current=200mA, Case/Package=TSSOP, JLCPCB Part #=C96225, Max Forward Surge Current (Ifsm)=4A, Max Operating Temperature=150°C, Max Repetitive Reverse Voltage (Vrrm)=100V, Max Reverse Current=500nA, Min Operating Temperature=-65°C, Package Quantity=1, Voltage=75V, Forward Current=200mA, Height=1mm, Lead Free="Lead Free", Length=2.2mm, Max Reverse Voltage (DC)=100V, Mounting Technology="Surface Mount", Packaging="Cut Tape", Pins=6, Reach SVHC Compliant=No, Reverse Recovery Time=4ns, Width=1.35mm
D2: library part CMP-002-001076-16, "WL-SMCW Mono-color Chip LED Waterclear, size 0603, Green, 3.3V, 40°", Case/Size Code=0603, Emitting Color=Green, Forward Voltage=3.3V, JLCPCB Part #=C7429914, Manufacturer="Wurth Elektronik", Operating Temperature Max=85°C, Operating Temperature Min=-40°C, Category="Signal LEDs", Chip Technology=InGaN, Component Type=Standard, ComponentLink1Description="Website Link", ComponentLink1URL=https://www.we-online.com/redexpert/article/150060GS84000?ad, ComponentLink2Description="Datasheet Link", ComponentLink2URL=https://www.we-online.com/redexpert/spec/150060GS84000?ad, Design Item ID=150060GS84000, Dominant Wavelength=525nm, Height=0.95mm, Length=1.6mm, Luminous Intensity=3000mcd, Manufacturer Part Number=150060GS84000, Match Code=WL-SMCW, Mount="Surface Mount", Packaging="Tape and Reel", Page Part #=MOVPA-0270A, Peak Wavelength=520nm, Pin Count=2, Source=WL-SMCW.SchLib, Viewing Angle=40°, Width=0.8mm
HY1: library part CMP-00025-00013-3, "Double Balanced Mixer, 0.5MHz Min, 500MHz Max, 7.8dB Conversion Loss-Max", Clock Frequency=500MHz, JLCPCB Part #=C2942210, Max Operating Temperature=85°C, Min Operating Temperature=-40°C, Mounting Technology="Surface Mount", Pins=6, Reach SVHC Compliant=Yes, RoHS Compliant=Yes
J1 J2 J3 J4 J5 J7 J8: library part CMP-002-00035-12, "Ultra Small Surface Mount Coaxial Connector, 50 Ohm, -40 to 90 degC, 3-Pin SMD, RoHS, Tape and Reel", Case/Package=U.FL-R-SMT, JLCPCB Part #=C88373, Manufacturer="Hirose Electric", Max Operating Temperature=90°C, Min Operating Temperature=-40°C, Package Description="3-Pin Surface Mount Device, Body 2.6 x 2.6 mm", Package Quantity=2500, Resistance=50Ohm, Connector Type=RF&Coax, Contact Material=Brass, Contact Plating=Gold, Datasheet URL=https://www.hirose.com/product/en/download_file/key_name/U.FL/category/Catalog/doc_file_id/31697/?file_category_id=4&item_id=15&is_series=1, Datasheet Version=Aug-16, Fastening Type=Snap, Impedance=50Ohm, Manufacturer URL=https://www.hirose.com, Mounting Technology=SM, Package Reference=U.FL-R-SMT, Packaging=TapeandReel, RoHS Compliant=True
J6: library part CMP-047-000040-15, "WR-WTB SMT Male Horizontal Shrouded Header, pitch 2mm, 2p", Contact Resistance=20mOhm, JLCPCB Part #=C295747, Operating Temperature="-25 to +85degC", Rated Current=2A, Withstanding Voltage=800VAC, Working Voltage=100VAC, Component Type=Standard, ComponentLink1Description=Manufacturer, ComponentLink1URL=http://www.we-online.de, ComponentLink2Description=Datasheet, ComponentLink2URL=https://www.we-online.com/catalog/datasheet/620102131822.pdf, Design Item ID=620102131822, Gender=Male, Mounting Technology=SMT, Packaging="Tape and Reel", Page Part #=K620102131822, Part Number=620102131822, Pin Count=2, Pin Number=2, Pitch=2mm, Published Date="January 2020", Publisher="Wurth Elektronik", Source=WR-WTB_2.00mm.SchLib, Type=Horizontal
L1: library part CMP-051-000215-6, "WE-KI SMT Wire Wound Ceramic Inductor, size 1008, 390nH, 0.47A", Case/Size Code=1008, DC Resistance Max=1.06Ohm, Inductance=390nH, Inductance Tolerance=+/-2%, Manufacturer="Wurth Elektronik", Operating Temperature Max=125°C, Operating Temperature Min=-40°C, Rated Current=0.47A, Self Resonant Frequency=530MHz, Category="RF Inductors", Component Type=Standard, ComponentLink1Description="Manufacturer Link", ComponentLink1URL=http://www.we-online.de, ComponentLink2Description=Datasheet, ComponentLink2URL=https://www.we-online.com/catalog/datasheet/744762239GA.pdf, Design Item ID=744762239GA, Height=1.6mm, Length=2.5mm, Manufacturer Part Number=744762239GA, Match Code=WE-KI, Mount=SMT, Packaging="Tape and Reel", Pin Count=2, Q Factor=45, Source=WE-KI.SchLib, Width=2mm
L2: library part CMP-003-000840-3, "WE-RFH SMT Ferrite Inductor, size 1008A, 6.8µH, 0.36A, 2O", Case/Size Code=1008A, DC Resistance Max=2O, Inductance=6.8µH, Inductance Tolerance=+/-5%, Manufacturer="Wurth Elektronik", Operating Temperature Max=85°C, Operating Temperature Min=-40°C, Rated Current=0.36A, Self Resonant Frequency=70MHz, Category="RF Inductors", Component Type=Standard, ComponentLink1Description="Website Link", ComponentLink1URL=https://www.we-online.com/redexpert/article/744758368A?ad, ComponentLink2Description="Datasheet Link", ComponentLink2URL=https://www.we-online.com/redexpert/spec/744758368A?ad, Design Item ID=744758368A, Height=1.7mm, Length=2.6mm, Manufacturer Part Number=744758368A, Match Code=WE-RFH, Mount="Surface Mount", Packaging="Tape and Reel", Pin Count=2, Q Factor=20, Source=WE-RFH.SchLib, Width=2.1mm
L3: library part CMP-051-000197-6, "WE-KI SMT Wire Wound Ceramic Inductor, size 1008, 68nH, 1A", Case/Size Code=1008, DC Resistance Max=0.15Ohm, Inductance=68nH, Inductance Tolerance=+/-2%, Manufacturer="Wurth Elektronik", Operating Temperature Max=125°C, Operating Temperature Min=-40°C, Rated Current=1A, Self Resonant Frequency=1300MHz, Category="RF Inductors", Component Type=Standard, ComponentLink1Description="Manufacturer Link", ComponentLink1URL=http://www.we-online.de, ComponentLink2Description=Datasheet, ComponentLink2URL=https://www.we-online.com/catalog/datasheet/744762168GA.pdf, Design Item ID=744762168GA, Height=1.6mm, Length=2.5mm, Manufacturer Part Number=744762168GA, Match Code=WE-KI, Mount=SMT, Packaging="Tape and Reel", Pin Count=2, Q Factor=60, Source=WE-KI.SchLib, Width=2mm
L4: library part CMP-051-000182-6, "WE-KI SMT Wire Wound Ceramic Inductor, size 1008, 18nH, 1A", Case/Size Code=1008, DC Resistance Max=0.1Ohm, Inductance=18nH, Inductance Tolerance=+/-5%, Manufacturer="Wurth Elektronik", Operating Temperature Max=125°C, Operating Temperature Min=-40°C, Rated Current=1A, Self Resonant Frequency=2700MHz, Category="RF Inductors", Component Type=Standard, ComponentLink1Description="Manufacturer Link", ComponentLink1URL=http://www.we-online.de, ComponentLink2Description=Datasheet, ComponentLink2URL=https://www.we-online.com/catalog/datasheet/744762118A.pdf, Design Item ID=744762118A, Height=1.6mm, Length=2.5mm, Manufacturer Part Number=744762118A, Match Code=WE-KI, Mount=SMT, Packaging="Tape and Reel", Pin Count=2, Q Factor=60, Source=WE-KI.SchLib, Width=2mm
MP1 MP2 MP3 MP4: library part CMP-00028-00004-15, "Mounting hole.  Add this so that mounting holes placed in your design don't automagically disappear when you import changes from the schematic.", Pins=1
Q1 Q2 Q3: library part CMP-014-00026-4, "NPN General Purpose Amplifier, 40 V, 0.2 A, -55 to 150 degC, 3-Pin SOT23, RoHS, Tape and Reel", Case/Package=TO-236-3, Frequency=300MHz, JLCPCB Part #=C20526, Manufacturer="Fairchild Semiconductor", Max Operating Temperature=150°C, Min Operating Temperature=-55°C, Package Description="3-Pin Small Outline Transistor, Body 2.92 x 1.325 mm, Pitch 0.95 mm", Package Quantity=3000, Package Reference=SOT23-3, Package Version="Rev. 12, 03/2016", Power=625mW, Datasheet URL=https://www.fairchildsemi.com/datasheets/MM/MMBT3904.pdf, Datasheet Version="Rev. 1.1.0, 10/2014", Elements=1, hFE Min=100, Manufacturer URL=https://www.fairchildsemi.com/, Mounting Technology=SM, Package URL=http://www.fairchildsemi.com/dwg/MA/MA03D.pdf, Packaging=TapeandReel, Pins=3, RoHS Compliant=True, Vce Max=300mV
R1 R2 R3 R4 R24 R25 R26 R27: library part CMP-009-00232-17, "Chip Resistor, Thick Film, General Purpose, 0603, 63mW, 50V, 100 Ohm, +/-1%", Case/Package=0603, JLCPCB Part #=C22775, Max Operating Temperature=155°C, Min Operating Temperature=-55°C, Power Rating=100mW, Resistor Type="Thick Film", Temperature Coefficient=100ppm/°C, Tolerance=1%, Voltage Rating=50V, Elements=1, Mounting Technology=SMT, Pins=2, RoHS Compliant=Yes, Usage="General Purpose"
R5: library part CMP-009-00230-18, "Chip Resistor, Thick Film, General Purpose, 0603, 100mW, 50V, 10 Ohm, +/-1%", Case/Package=0603, JLCPCB Part #=C22859, Max Operating Temperature=155°C, Min Operating Temperature=-55°C, Power Rating=100mW, Resistor Type="Thick Film", Temperature Coefficient=200ppm/°C, Tolerance=1%, Voltage Rating=50V, Elements=1, Mounting Technology=SMT, Pins=2, RoHS Compliant=Yes, Usage="General Purpose"
R6 R13: library part CMP-009-00203-21, "Chip Resistor, Thick Film, General Purpose, 0603, 100mW, 50V, 330 Ohm, +/-1%", Case/Package=0603, JLCPCB Part #=C23138, Max Operating Temperature=155°C, Min Operating Temperature=-55°C, Power Rating=100mW, Resistor Type="Thick Film", Temperature Coefficient=100ppm/°C, Tolerance=1%, Voltage Rating=50V, Elements=1, Mounting Technology=SMT, Page Part #=ROQF3300, Pins=2, Usage="General Purpose"
R7: library part CMP-009-00393-1, "SMD Chip Resistor, 680 Ohm, ï¿½ 1%, 100 mW, 0603 [1608 Metric], Thick Film, Precision", Case Code (Imperial)=0603, Case Code (Metric)=1608, JLCPCB Part #=C23228, Max Operating Temperature=155°C, Max Power Dissipation=100mW, Min Operating Temperature=-55°C, Package Quantity=1, Resistance Tolerance=1%, Resistor Type="Thick Film", Temperature Coefficient=100ppm/°C, Voltage Rating=75V, Case/Package=0603, Construction=Rectangular, Contact Plating=Tin, Depth=0.8mm, Features="Automotive AEC-Q200", Height=0.022inch, Lead Free="Lead Free", Length=1.6mm, Military Standard=Not, Mounting Technology="Surface Mount", Number of Terminations=2, Packaging="Tape and Reel", Pins=2, Power Rating=100mW, Radiation Hardening=No, Reach SVHC Compliant=No, RoHS Compliant=Yes, Series=ERJ, Termination=SMD/SMT, Tolerance=1%, Voltage Rating (DC)=75V, Width=0.8mm
R8 R16: library part CMP-009-00405-1, "Res Thick Film 0603 3.6K Ohm 1% 0.1W(1/10W) ±100ppm/°C Pad SMD T/R", Case/Package=0603, JLCPCB Part #=C22980, Lead Free="Lead Free", RoHS Compliant=Yes
R9: library part CMP-009-00201-21, "Chip Resistor, Thick Film, General Purpose, 0603, 100mW, 50V, 1.5 kOhm, +/-1%", Case/Package=0603, JLCPCB Part #=C22843, Max Operating Temperature=155°C, Min Operating Temperature=-55°C, Power Rating=100mW, Resistor Type="Thick Film", Tolerance=1%, Voltage Rating=50V, Elements=1, Mounting Technology=SMT, Pins=2, RoHS Compliant=Yes, Usage="General Purpose"
R10: library part CMP-009-00372-5, "SMD Chip Resistor, 47 Ohm, ± 1%, 100 mW, 0603 [1608 Metric], Thick Film, General Purpose", Case Code (Imperial)=0603, Case Code (Metric)=1608, JLCPCB Part #=C23182, Max Operating Temperature=155°C, Max Power Dissipation=100mW, Min Operating Temperature=-55°C, Resistance Tolerance=1%, Resistor Type="Thick Film", Temperature Coefficient=100ppm/°C, Voltage Rating=75V, Voltage Rating (AC)=50V, Case/Package=0603, Construction=Rectangular, Depth=0.8mm, Features="Moisture Resistant", Height=0.45mm, Lead Free="Lead Free", Length=1.6mm, Military Standard=Not, Number of Terminations=2, Packaging="Tape and Reel", Pins=2, Power Rating=100mW, Reach SVHC Compliant=Unknown, RoHS Compliant=Yes, Series=RC, Termination=SMD/SMT, Tolerance=1%, Usage="General Purpose", Voltage Rating (DC)=50V, Weight=7.1E-05oz, Width=0.8mm
R11: library part CMP-009-00407-1, "SMD Chip Resistor, 91 Ohm, ± 1%, 100 mW, 0603 [1608 Metric], Thick Film, General Purpose", Case Code (Imperial)=0603, Case Code (Metric)=1608, JLCPCB Part #=C2960792, Max Operating Temperature=155°C, Max Power Dissipation=100mW, Min Operating Temperature=-55°C, Temperature Coefficient=100ppm/°C, Tolerance=1%, Voltage Rating=50V, Case/Package=0603, Construction=Rectangular, Depth=0.8mm, Features="Moisture Resistant", Height=0.45mm, Lead Free="Lead Free", Length=1.6mm, Military Standard=Not, Number of Terminations=2, Packaging="Tape and Reel", Power Rating=100mW, RoHS Compliant=Yes, Series=RC, Termination=SMD/SMT, Voltage Rating (DC)=50V, Width=0.8mm
R12: library part CMP-009-00408-1, "SMD Chip Resistor, 18 ohm, ï¿½ 1%, 100 mW, 0603 [1608 Metric], Thick Film, General Purpose", Case Code (Imperial)=0603, Case Code (Metric)=1608, JLCPCB Part #=C2933165, Max Operating Temperature=155°C, Max Power Dissipation=100mW, Min Operating Temperature=-55°C, Package Quantity=5000, Resistance Tolerance=1%, Resistor Type="Thick Film", Temperature Coefficient=100ppm/°C, Voltage Rating=50V, Working Voltage=75V, Case/Package=0603, Construction=Rectangular, Depth=0.8mm, Features="Moisture Resistant", Height=0.45mm, Lead Free="Lead Free", Length=1.6mm, Military Standard=Not, Number of Terminations=2, Packaging="Tape and Reel", Pins=2, Power Rating=100mW, Reach SVHC Compliant=Unknown, RoHS Compliant=Yes, Series=RC, Technology="THICK FILM", Termination=SMD/SMT, Tolerance=1%, Voltage Rating (AC)=50V, Voltage Rating (DC)=50V, Width=0.8mm
R14: library part CMP-009-00190-23, "Chip Resistor, Thick Film, General Purpose, 0603, 100mW, 50V, 470 Ohm, +/-1%", Case/Package=0603, JLCPCB Part #=C23179, Max Operating Temperature=155°C, Min Operating Temperature=-55°C, Power Rating=100mW, Resistor Type="Thick Film", Tolerance=1%, Voltage Rating=50V, Elements=1, Mounting Technology=SMT, Pins=2, RoHS Compliant=Yes, Usage="General Purpose"
R15: library part CMP-009-00411-1, "Res Thick Film 0603 62 Ohm 1% 1/10W ±100ppm/°C Molded SMD SMD Paper T/R", Case Code (Imperial)=0603, Case Code (Metric)=1608, JLCPCB Part #=C23222, Max Operating Temperature=155°C, Max Power Dissipation=100mW, Min Operating Temperature=-55°C, Package Quantity=5000, Ratings=AEC-Q200, Temperature Coefficient=100ppm/°C, Tolerance=1%, Case/Package=0603, Contact Plating=Tin,Matte, Features="Automotive AEC-Q200", Height=0.022inch, Length=0.061inch, Mounting Technology="Surface Mount", Number of Terminations=2, Packaging="Tape and Reel", Radiation Hardening=No, RoHS Compliant=Yes, Series=RMCF, Width=0.031inch
TF1 TF2: library part CMP-142-000004-8, "Pulse Transformers and Modules for LAN, Transformer, LxWxH=4.5x3.2x2.9mm", JLCPCB Part #=C7501942, Max Operating Temperature=105°C, Min Operating Temperature=-40°C, 3D_model=step, Article=YTFM1000, Category=Transformer, Component Type=Standard, Cost=0,2, Design Item ID=YTFM1000, FLIR Part #=YTFM1000, Mounting Technology="Surface Mount", Packaging="Cut Tape", Pin Count=6, Property 1=100µH, Property 2=8mA, Property 3=1500Vrms, RoHS Compliant=Yes, Series=ALT, Source=BRD240510.SCHLIB, Status=P, SubCategory=Signal, Transformer Type=LAN, Turns Ratio=1:1
TP1 TP2: library part CMP-027-000000-17, "Testpad land", Component Type=Standard, Design Item ID=Testpad, Pin Count=1

## Via types
v1: diameter 0.6, hole 0.3, Top Layer to Bottom Layer, tented both sides, 152 vias

## Nets (pads, with @x,y where several pads share a name; then routed paths per layer and width w, separated by ;. In a path a pad name is that pad's centre, name@x,y a point inside that pad or via, vN(x,y) a via of type N, cw(c..) or ccw(c..) an arc to the next point about the centre after c; other vN are vias at no path point)
GND: C6.1 C7.1 C8.1 C9.1 C10.1 HY1.1 HY1.4 HY1.5 J1.1 J1.2 J2.1 J2.2 J3.1 J3.2 J4.1 J4.2 J5.1 J5.2 J6.2 J6.MP1 J6.MP2 J7.1 J7.2 J8.1 J8.2 L3.1 L4.1 MP1.1 MP2.1 MP3.1 MP4.1 R9.1 R11.1 R12.1 R13.1 R14.1 R15.1 R16.1 TF1.2 TF1.3 TF2.3 TP2.1 | length 9.1
  Top Layer w0.338: v1(9.4,7.3) R9.1 ; v1(10.5,4.2) R11.1 ; v1(12,1.2) R12.1 ; R13.1 v1(15.3,1.2) ; v1(15.9,3.3) R14.1 ; v1(19.9,3.3) R15.1 ; v1(24.5,13.8) R16.1 ; R16.1@24.525,14.7 25.325,15.5 TP2.1
  other v1: 4,1.75 46,1.75 2.875,2.051 5.125,2.051 44.875,2.051 47.125,2.051 2.051,2.875 5.949,2.875 44.051,2.875 47.949,2.875 1.75,4 6.25,4 43.75,4 48.25,4 2.051,5.125 5.949,5.125 44.051,5.125 47.949,5.125 2.875,5.949 5.125,5.949 44.875,5.949 47.125,5.949 4,6.25 46,6.25 2.1,8.1 2.9,8.1 3.6,8.1 46.6,8.6 47.4,8.6 48.1,8.6 2,13 2.8,13 3.6,13 46.7,13.4 47.4,13.4 48.2,13.4 1.5,14 2.2,14 2.9,14 3.6,14 4.3,14 7.5,16.5 8.5,16.5 9.5,16.5 10.5,16.5 11.5,16.5 12.5,16.5 13.5,16.5 14.5,16.5 15.5,16.5 16.5,16.5 1.4,23 2.1,23 2.8,23 3.5,23 4.2,23 12.5,23.6 13.2,23.6 13.9,23.6 26.7,24.4 1.7,24.575 2.5,24.575 3.2,24.575 37,25 37.9,25 39,25 40,25 41,25 26.7,25.1 37,26 15.3,26.2 18,27.5 19,27.5 20,27.5 21,27.5 22,27.5 24.8,27.5 15.5,27.8 8.8,28.5 9.6,28.5 10.4,28.5 11.2,28.5 12,28.5 12.8,28.5 1.8,29.375 2.5,29.375 3.3,29.375 1.7,30.6 2.5,30.6 3.2,30.6 46.7,30.6 47.5,30.6 48.2,30.6 19,32 20,32 21,32 22,32 23,32 24,32 1.8,35.5 2.5,35.5 3.3,35.5 46.8,35.5 47.5,35.5 48.3,35.5 23.5,36.3 24.6,36.3 1.7,36.6 2.5,36.6 3.2,36.6 46.7,36.6 47.5,36.6 48.2,36.6 1.8,41.4 2.5,41.4 3.3,41.4 46.8,41.4 47.5,41.4 48.3,41.4 4,43.75 46,43.75 2.875,44.051 5.125,44.051 44.875,44.051 47.125,44.051 2.051,44.875 5.949,44.875 44.051,44.875 47.949,44.875 1.75,46 6.25,46 43.75,46 48.25,46 2.051,47.125 5.949,47.125 44.051,47.125 47.949,47.125 2.875,47.949 5.125,47.949 44.875,47.949 47.125,47.949 4,48.25 46,48.25
IF: C18.2 C19.2 L2.1 R3.1 R23.2 R26.1 | length 10.1
  Top Layer w0.338: C19.2 C18.2 L2.1 ; R23.2 36.075,35.875 36.075,33.625 L2.1 ; R3.1 R26.1 36.7,31.025 35.95,31.775 L2.1
LO: C5.1 C15.1 J1.3 | length 3.2
  Top Layer w0.338: J1.3 C5.1 C15.1
NetC1_1: C1.1 L1.2 | length 1.6
  Top Layer w0.338: L1.2 C1.1
NetC2_1: C2.1 L2.2 | length 1.6
  Top Layer w0.338: L2.2@38.05,33 C2.1
NetC2_2: C2.2 C3.2 R4.2 R27.2 | length 4.9
  Top Layer w0.338: R4.2 R27.2 C2.2 C3.2
NetC3_1: C3.1 J3.3 | length 1.7
  Top Layer w0.338: C3.1 J3.3
NetC4_1: C4.1 J4.3 | length 1.7
  Top Layer w0.338: J4.3 C4.1
NetC4_2: C4.2 L1.1 R1.1 R24.1 | length 5.2
  Top Layer w0.338: C4.2 R1.1 R24.1 8.7,34.525 8.231,34.994 8.231,36.219 L1.1
NetC5_2: C5.2 HY1.6 | length 19.3
  Top Layer w0.338: C5.2 v1(15.5,27) ; v1(24,27.5) 24,29.42 HY1.6
  Bottom Layer w0.338: v1(15.5,27) 16,26.5 23,26.5 v1(24,27.5)
NetC6_2: C6.2 L3.2 R3.2 R4.1 R26.2 R27.1 | length 7.8
  Top Layer w0.338: C6.2 38.125,27.925 39.875,27.925 L3.2 39.981,28.05 39.7,28.331 R4.1 39.394,29.806 39.394,29.881 39,30.275 ; R3.2 38.606,29.806 38.606,29.881 39,30.275 ; R26.2 38.3,30.975 39,30.275 ; R27.1 39.7,30.975 39,30.275
NetC7_2: C7.2 C8.2 L4.2 R1.2 R2.1 R24.2 R25.1 | length 10.1
  Top Layer w0.338: C7.2@9,31.5 C8.2@13,31.5 ; R1.2 10.606,33.306 10.606,33.381 11.7,34.475 R25.1 ; R24.2 10.3,34.475 11.394,33.381 11.394,33.306 R2.1 11.7,31.831 11.419,31.55 L4.2
NetC9_2: C9.2 J6.1 R5.1 | length 4.5
  Top Layer w0.338: J6.1 R5.1
NetC11_1: C11.1 R7.1 | length 1.5
  Top Layer w0.338: C11.1 R7.1
NetC11_2: C11.2 C12.1 Q2.1 R8.1 R9.2 | length 6.6
  Top Layer w0.338: C12.1 8.683,10.5 ; R8.1@9.375,11.2 9.069,10.894 9.069,10.887 8.683,10.5 ; R8.1 C11.2 ; Q2.1 11.09,9.415 10.705,9.8 9.375,9.8 8.683,10.492 8.683,10.5
NetC12_2: C12.2 J7.3 | length 1.7
  Top Layer w0.338: J7.3 C12.2
NetC13_1: C13.1 R10.2 | length 21.7
  Top Layer w0.338: R10.2 23.2,5.525 28.675,11 C13.1
NetC13_2: C13.2 J8.3 | length 1.7
  Top Layer w0.338: C13.2 J8.3
NetC14_1: C14.1 Q2.2 R11.2 | length 3.3
  Top Layer w0.338: Q2.2 11.365,7.55 11.365,5.835 R11.2 C14.1
NetC14_2: C14.2 R12.2 R13.2 | length 2.9
  Top Layer w0.338: C14.2 R12.2 R13.2
NetC15_2: C15.2 TF1.1 | length 7.4
  Top Layer w0.338: C15.2 7.3,25.475 7.606,25.169 7.631,25.169 10.82,21.98 TF1.1
NetC16_2: C16.2 J2.3 | length 7.7
  Top Layer w0.338: J2.3 C16.2
NetC17_2: C17.2 HY1.3 | length 3.4
  Top Layer w0.338: C17.2 16.3,33.025 16.606,33.331 16.631,33.331 17.1,33.8 18.307,33.8 18.96,34.453 HY1.3
NetC18_1: C18.1 HY1.2 | length 14.9
  Top Layer w0.338: HY1.2 21.5,36.5 22.1,37.1 29.1,37.1 32.369,33.831 32.394,33.831 32.7,33.525 C18.1
NetC19_1: C19.1 TF2.6 | length 11.8
  Top Layer w0.338: TF2.6 31.3,22.3 32.7,23.7 C19.1
NetC20_2: C20.2 TF2.5 | length 23.1
  Top Layer w0.338: C20.2 16.3,27.5 17.5,26.3 31.2,26.3 31.5,26 31.5,24.6 31.075,24.175 30.4,24.175 TF2.5
NetD1_1: D1.1 D1.5 TF1.5 | length 5.4
  Top Layer w0.338: TF1.5 18.477,24.175 19.153,23.5 D1.5 20.406,23.469 20.962,23.469 21.581,22.85 D1.1
NetD1_2: D1.2 D1.4 TF1.4 | length 5.5
  Top Layer w0.338: TF1.4 19.287,25.013 20.15,24.15 D1.4 20.406,24.119 21.073,24.119 21.692,23.5 D1.2
NetD1_3: D1.3 TF2.2 | length 3.2
  Top Layer w0.338: D1.3 22.656,24.119 23.158,24.119 24.487,22.79 TF2.2
NetD1_6: D1.6 TF2.1 | length 5.2
  Top Layer w0.338: D1.6 20.6,22.85 21.47,21.98 TF2.1
NetD2_1: D2.1 R16.2 | length 1.4
  Top Layer w0.338: R16.2 D2.1
NetJ5_1: J5.3 R23.1 | length 9.4
  Top Layer w0.338: R23.1 37.8,36.025 40.775,39 J5.3
NetQ1_1: Q1.1 Q2.3 R6.1 R7.2 | length 6.5
  Top Layer w0.338: R7.2 R6.1 13.9,9.4 ; Q2.3 13.71,8.5 13.846,8.636 13.846,8.876 13.9,8.93 13.9,9.4 ; Q1.1 13.915,9.415 13.9,9.4
NetQ1_2: Q1.2 Q3.1 R14.2 | length 6.9
  Top Layer w0.338: R14.2 15.865,5.835 15.865,7.55 Q1.2 18.382,7.585 18.918,8.121 18.918,8.743 19.59,9.415 Q3.1
NetQ3_2: Q3.2 R10.1 R15.2 | length 3.6
  Top Layer w0.338: Q3.2 19.865,7.55 19.865,5.835 20.05,5.65 21.45,5.65 R10.1
RF: C1.2 C16.1 C17.1 C20.1 R2.2 R25.2 | length 8.9
  Top Layer w0.338: C16.1 C1.2 R25.2 R2.2 C17.1 C20.1
VCC: C10.2 D2.2 Q1.3 Q3.3 R5.2 R6.2 R8.2 TP1.1 | length 4.2
  Top Layer w0.338: Q1.3 Q1.3@18,8.53 ; 23,19.3 23.025,19.325 D2.2 24.825,19 TP1.1
pads on no net: TF1.6 TF2.4

## Polygon pours and split planes (outlines as drawn)
VCC on Top Layer "VCC_L01_P001" (solid, remove dead copper, pour order 1): 14.2,20.3 14.2,18.8 17.5,18.8 17.5,15.5 8.5,15.5 8.5,12.5 15,12.5 17,10.5 16.9,10.4 16.9,7.9 23.5,7.9 23.5,20.3
GND on Top Layer "GND_L01_P000" (solid, remove dead copper, pour order 0): 22.9,36.7 22.9,33 17.5,33 17.5,27 23,27 23,31.5 25,31.5 25,36.7
GND on Layer 2 "GND_L02_P003" (solid, remove dead copper, pour order 3): 0,50 0,0 50,0 50,50
GND on Layer 3 "GND_L03_P002" (solid, remove dead copper, pour order 2): 0,50 0,0 50,0 50,50

## Other copper
Top Layer:
  rectangle net GND: 6.9,16 17,18.3
  rectangle net GND: 36.6,24.6 41.4,26.7
  rectangle net GND: 24.2,24.1 27.1,25.4
  rectangle net GND: 8.4,28.1 13.6,30.3
  rectangle net GND: 12.2,22.4 14.3,25.4
  rectangle net GND: 46.4,34 48.6,35.9
  region net GND: 48.6,38.1 46.4,38.1 46.4,36.2 48.6,36.2
  region net GND: 48.6,32.1 46.4,32.1 46.4,30.2 48.6,30.2
  rectangle net GND: 46.4,39.9 48.6,41.8
  rectangle net GND: 1.4,34 3.6,35.9
  region net GND: 3.6,32.1 1.4,32.1 1.4,30.2 3.6,30.2
  region net GND: 3.6,26.075 1.4,26.075 1.4,24.175 3.6,24.175
  rectangle net GND: 1.4,27.875 3.6,29.775
  region net GND: 3.6,38.1 1.4,38.1 1.4,36.2 3.6,36.2
  rectangle net GND: 1.4,39.9 3.6,41.8
  rectangle net GND: 46.3,11.9 48.5,13.8
  region net GND: 48.5,10.1 46.3,10.1 46.3,8.2 48.5,8.2
  region net GND: 4,9.6 1.8,9.6 1.8,7.7 4,7.7
  rectangle net GND: 1.1,21 4.6,23.3
  region net GND: 4.6,16 1.1,16 1.1,13.7 4.6,13.7
  rectangle net GND: 1.7,11.4 4,13.7

## Silkscreen, mask and mechanical layers (free items; w line width, h text height)
Top Overlay:
  text ".board_name / .board_revision.-" at 18.397,44.135 h2.5
  text ".VersionControl_RevNumberShort" at 26,40.943 h2.5
  text "RF" at 4.75,33.873 h3
  text "IF" at 43.65,30.273 h3
  text "LO" at 4.75,27.928 h3
  text "+5V" at 17.55,18.573 h3
  text "GND" at 17.45,15.928 h3
  text "OUT" at 40.45,8.228 h3
  text "IN" at 5.25,7.673 h3
Board outline:
  the board outline again, w0.1
Fab Notes:
  drawing of 196 lines, arcs and shapes, not listed
  text "Layer" at 58,70.5 h2
  text "Name" at 66.421,70.5 h2
  text "Material" at 83.083,70.5 h2
  text "Thickness" at 94.299,70.5 h2
  text "Constant" at 105.592,70.5 h2
  text "Board Layer Stack" at 116.945,70.5 h2
  text "Top Overlay" at 66.421,66.5 h2
  text "Top Solder" at 66.421,62.5 h2
  text "SM-001" at 83.083,62.5 h2
  text "0.025mm" at 94.299,62.5 h2
  text "4" at 105.592,62.5 h2
  text "1" at 58,58.5 h2
  text "Top Layer" at 66.421,58.5 h2
  text "CF-004" at 83.083,58.5 h2
  text "0.035mm" at 94.299,58.5 h2
  text "Dielectric 2" at 66.421,54.5 h2
  text "PP-022" at 83.083,54.5 h2
  text "0.208mm" at 94.299,54.5 h2
  text "4.5" at 105.592,54.5 h2
  text "2" at 58,50.5 h2
  text "Layer 2" at 66.421,50.5 h2
  text "CF-003" at 83.083,50.5 h2
  text "0.018mm" at 94.299,50.5 h2
  text "Dielectric 3" at 66.421,46.5 h2
  text "Core-042" at 83.083,46.5 h2
  text "0.991mm" at 94.299,46.5 h2
  text "4.6" at 105.592,46.5 h2
  text "3" at 58,42.5 h2
  text "Layer 3" at 66.421,42.5 h2
  text "CF-003" at 83.083,42.5 h2
  text "0.018mm" at 94.299,42.5 h2
  text "Dielectric 5" at 66.421,38.5 h2
  text "PP-022" at 83.083,38.5 h2
  text "0.208mm" at 94.299,38.5 h2
  text "4.5" at 105.592,38.5 h2
  text "4" at 58,34.5 h2
  text "Bottom Layer" at 66.421,34.5 h2
  text "CF-004" at 83.083,34.5 h2
  text "0.035mm" at 94.299,34.5 h2
  text "Bottom Solder" at 66.421,30.5 h2
  text "SM-001" at 83.083,30.5 h2
  text "0.025mm" at 94.299,30.5 h2
  text "4" at 105.592,30.5 h2
  text "Bottom Overlay" at 66.421,26.5 h2
Board:
  text "1. Layer count : .Layer_Count / 2. Dimensions : .Board_Width x .Board_Height / 3. PCB Thickness : .Total_Thickness / 4. PCB Color : green / 5. Silkscreen : white / 6. Material type : >=FR4-TG155 / 7. Surface finish : Pb-free HASL / 8. Gold thickness : 1U\" / 9. Outer copper weight : 1oz / 10. Inner copper weight : 0.5oz / 11. Impedance control : No / 12. Layer stackup : JLC04161H-7628 / 13. Via covering : Tented / 14. Minimum hole size : .Hole_Size_Min / 15. Board outline tolerance : +/- 0.2mm / 16. Mark on PCB : 2D bardcode & Number | Data Matrix Code | .board_name _ABCDE_0001 | 8x8mm / 17. Gold fingers : No / 18. Castellated holes : No / 19. Press-fit holes : No / 20. Edge plating : No / 21. Hole count : .Hole_Count / 22. SMD solder joints : .PadSMD_Count / 23. Through-hole solder joints : .PadThru_Count" at 56,-14.969 h2